# Altium PCB HSBNE-IO.PcbDoc (part 2 of 2)
Units mm, origin at the board's own origin, x right, y up, seen from the top; angles counter-clockwise.
Board outline 100.03 x 80.03 mm, 2 copper layers (Top Layer, Bottom Layer); 109 components, 155 nets, 584 pads, 281 vias.
Unrouted connection lines stored in the file: 2.
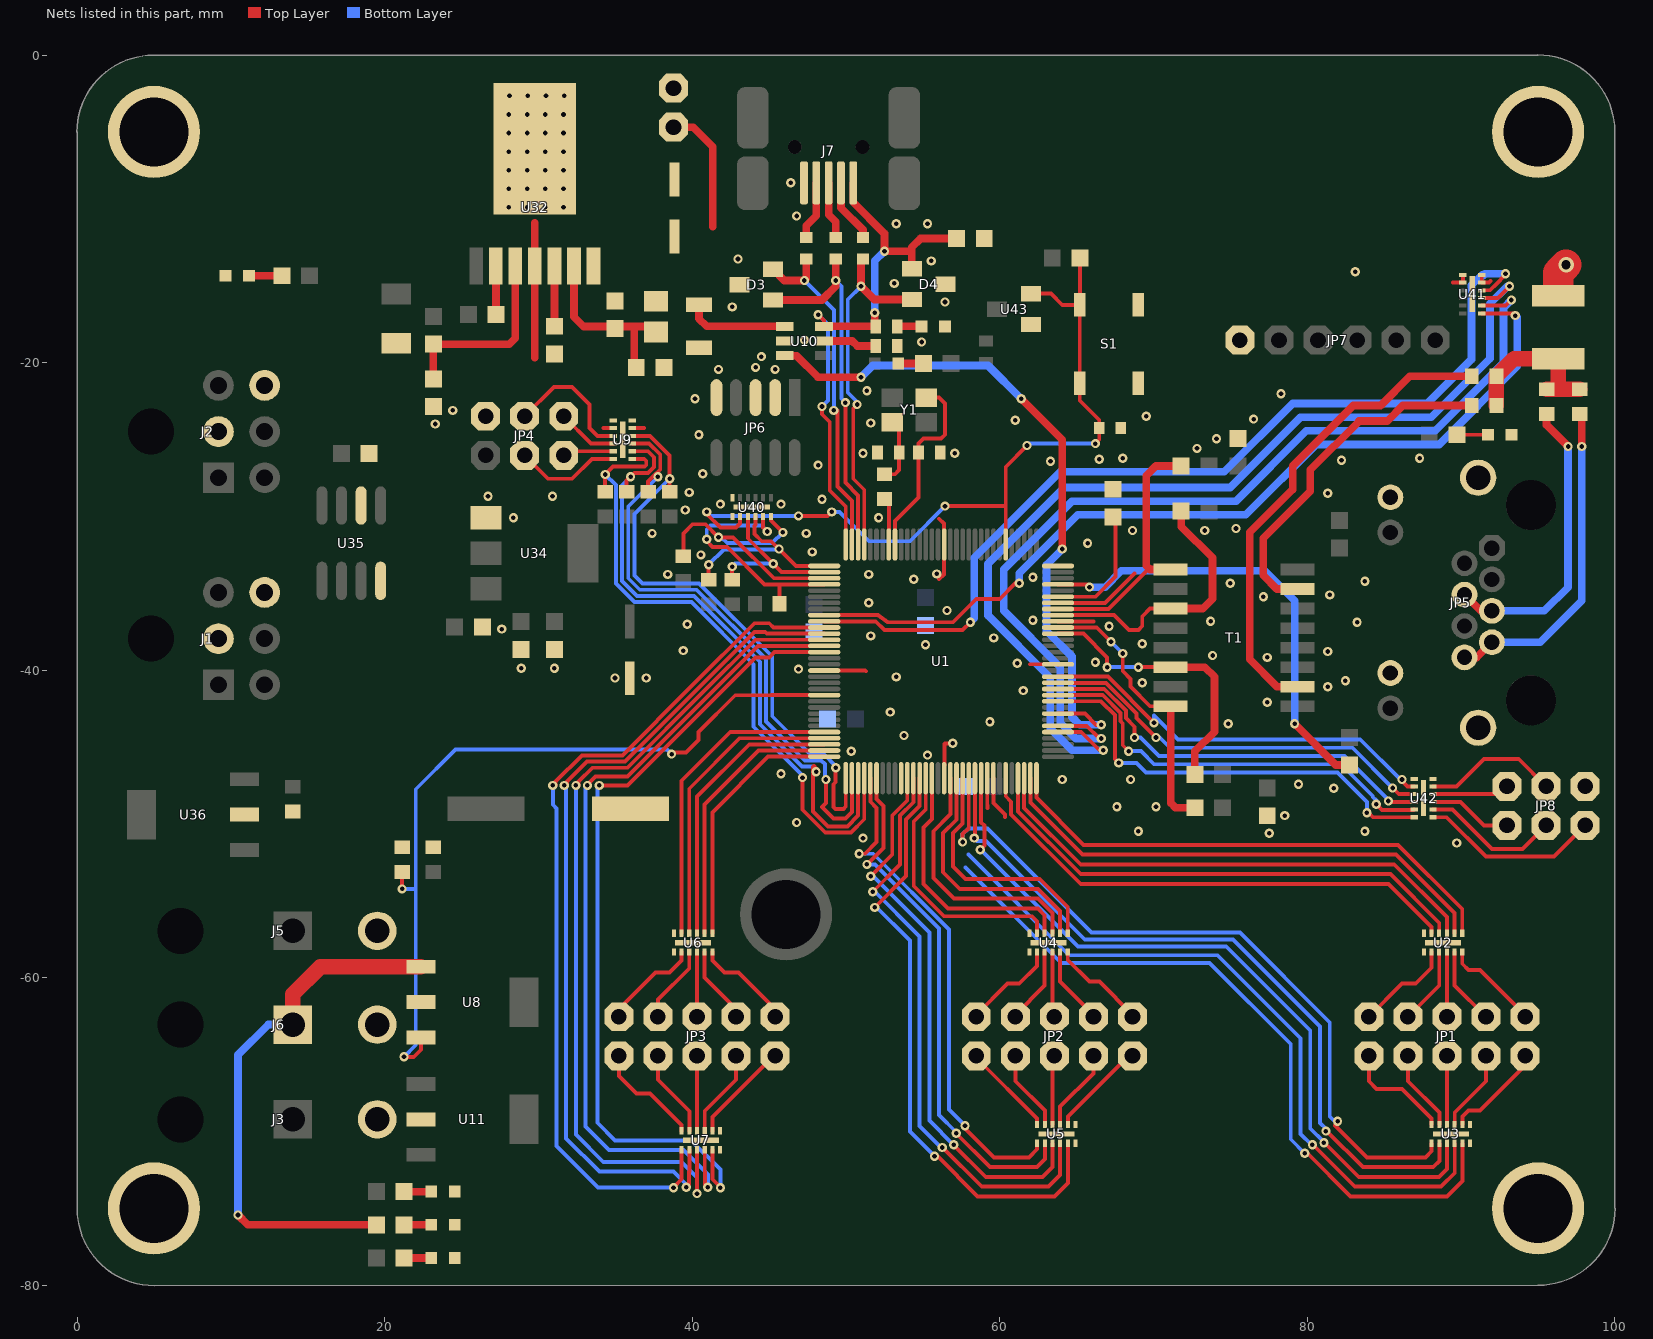
[diagram p2: the nets of this part, all layers, seen from the top]

## Via types
v1: diameter 0.6, hole 0.3, Top Layer to Bottom Layer, tented both sides, 252 vias
v2: diameter 0.6, hole 0.3, Top Layer to Bottom Layer, tented bottom, 28 vias
v3: diameter 1, hole 0.6, Top Layer to Bottom Layer, tented both sides, 1 vias

## Nets (pads, with @x,y where several pads share a name; then routed paths per layer and width w, separated by ;. In a path a pad name is that pad's centre, name@x,y a point inside that pad or via, vN(x,y) a via of type N, cw(c..) or ccw(c..) an arc to the next point about the centre after c; other vN are vias at no path point) (continued)
GND: C3.1 C4.- C5.1 C6.- C7.2 C8.2 C9.1 C10.1 C11.1 C12.1 C13.- C14.1 C15.1 C16.1 C17.1 C20.1 C21.1 C24.1 C25.1 C26.1 C27.2 D1.2 D2.2 D3.3 D4.3 D5.2 D7.2 D8.2 D9.2 J1.2 J1.6 J2.2 J2.6 J3.2 J4.2 J5.2 J6.2 J7.5 JP4.2 JP5.10 JP5.12 JP5.GND1 JP5.GND2 JP6.3 JP6.5 JP6.9 JP7.6 JP8.6 pad.0 pad.1 pad.2 pad.3 R6.1 R7.1 R10.1 R25.1 R26.1 R27.1 R28.1 S1.1 S1.2 U1.10 U1.17 U1.48 U1.55 U1.58 U1.64 U1.80 U1.114 U2.6 U2.7 U2.13 U3.6 U3.7 U3.13 U4.6 U4.7 U4.13 U5.6 U5.7 U5.13 U6.6 U6.7 U6.13 U7.6 U7.7 U7.13 U8.2 U9.5 U9.6 U9.7 U9.8 U9.13 U10.2 U11.2 U32.4 U32.8 U34.1 U35.2 U35.8 U36.2 U40.6 U40.7 U40.13 U41.5 U41.6 U41.7 U41.8 U41.13 U42.6 U42.7 U42.13 U43.1 | length 33.8
  Top Layer w0.254: 34.226,-24.259 U9.8@34.87,-24.259 ; U9.5@36.098,-24.259 36.869,-24.259 ; U1.114@48.585,-40.021 51.247,-40.021 51.293,-40.067 ; 56.058,-34.087 56.374,-33.771 56.374,-31.832 U1.80@56.385,-31.821 56.374,-31.81 56.374,-30.466 56.058,-30.15 ; U1.17@56.385,-47.021 56.385,-46.188 56.396,-46.177 56.396,-44.798 ; 56.439,-44.755 v1(56.947,-44.755) ; 61.962,-39.61 63.785,-39.61 U1.48@63.785,-39.621 ; U1.55@63.785,-36.821 66.091,-36.821 ; U1.58@63.785,-35.621 66.843,-35.621 68.758,-33.706 ; 89.471,-14.795 U41.8@90.115,-14.795 U41.7@90.115,-14.295 ; U41.6@91.343,-14.295 U41.5@91.343,-14.795 91.802,-14.795 91.916,-14.681
  Top Layer w0.5: 29.769,-19.675 U32.4@29.769,-13.722 29.769,-10.912
  Top Layer w2: C27.2@96.317,-15.164 96.317,-14.148 v3(96.825,-13.64)
  other v1: 89.713,-51.232 51.105,-50.917 77.521,-50.597 69.012,-50.47 83.744,-50.47 46.787,-49.901 78.537,-49.454 67.615,-48.885 70.155,-48.885 81.712,-47.676 79.426,-47.422 64.059,-47.107 68.504,-47.107 45.771,-46.726 55.296,-45.517 50.343,-45.263 53.772,-44.247 74.854,-43.485 59.36,-43.358 52.883,-42.723 77.394,-42.088 61.519,-41.326 81.331,-41.072 69.266,-40.818 82.474,-40.691 34.976,-40.503 37.008,-40.503 53.264,-40.437 46.914,-39.929 28.88,-39.868 31.039,-39.868 61.138,-39.548 66.218,-39.487 77.394,-39.167 73.838,-39.04 81.331,-38.786 39.421,-38.725 55.169,-38.344 69.266,-38.278 59.614,-37.897 51.613,-37.77 27.61,-37.328 67.107,-37.135 39.675,-37.008 83.236,-36.881 73.711,-36.82 62.154,-36.754 56.566,-36.119 51.486,-35.611 77.14,-35.23 81.458,-35.103 74.981,-34.341 83.744,-34.214 54.407,-34.087 62.154,-33.96 38.405,-33.772 51.486,-33.772 55.9,-33.737 40.564,-32.502 47.803,-32.309 65.71,-31.74 37.389,-31.105 47.422,-31.105 68.631,-30.912 73.33,-30.912 75.362,-30.785 28.372,-30.089 52.121,-30.089 39.548,-29.581 41.834,-29.2 45.771,-29.2 48.438,-28.88 26.721,-28.692 30.912,-28.692 81.331,-28.499 39.802,-28.438 40.691,-27.229 48.184,-26.66 63.297,-26.406 82.22,-26.34 66.472,-26.279 67.996,-26.213 87.3,-26.213 51.105,-25.898 57.074,-25.898 72.822,-25.578 74.092,-24.943 40.437,-24.689 23.292,-23.993 51.613,-23.927 61.011,-23.739 76.505,-23.673 69.52,-23.485 24.435,-23.104 40.183,-22.342 78.283,-22.022 51.359,-21.834 41.707,-20.437 45.39,-20.437 44.12,-20.31 44.501,-19.609 54.915,-18.659 47.295,-18.532 42.596,-16.373 56.439,-16.053 53.137,-14.849 83.109,-14.087 55.55,-13.386 42.977,-13.259 53.264,-10.973 55.296,-10.973 46.787,-10.465 46.406,-8.306
  other v2: 28.076,-9.896 29.261,-9.896 30.446,-9.896 31.632,-9.896 28.076,-8.69 29.261,-8.69 30.446,-8.69 31.632,-8.69 28.076,-7.483 29.261,-7.483 30.446,-7.483 31.632,-7.483 28.076,-6.277 29.261,-6.277 30.446,-6.277 31.632,-6.277 28.076,-5.07 29.261,-5.07 30.446,-5.07 31.632,-5.07 28.076,-3.864 29.261,-3.864 30.446,-3.864 31.632,-3.864 28.118,-2.657 29.303,-2.657 30.489,-2.657 31.674,-2.657
I2C5CLK: R32.1 U1.1 U9.4 | length 38.5
  Top Layer w0.254: U9.4@36.098,-24.759 37.266,-24.759 38.532,-26.025 v1(38.532,-27.549) R32.1@38.532,-28.4 ; v1(49.327,-46.345) 49.327,-47.288 49.2,-47.415 49.2,-48.885 49.327,-49.012 49.835,-49.012 49.985,-48.862 U1.1@49.985,-47.021
  Bottom Layer w0.254: v1(38.532,-27.549) 36.246,-29.835 36.246,-33.853 36.754,-34.361 40.454,-34.361 45.205,-39.112 45.205,-42.994 47.667,-45.456 48.552,-45.456 49.327,-46.231 v1(49.327,-46.345)
I2C5CLK_FIL: JP4.4 U9.9 | length 8.8
  Top Layer w0.254: JP4.4@29.104,-23.485 31.009,-21.58 32.182,-21.58 33.325,-22.723 33.325,-24.247 33.837,-24.759 U9.9@34.87,-24.759
I2C5SDA: R33.1 U1.2 U9.3 | length 40.3
  Top Layer w0.254: U9.3@36.098,-25.259 37.194,-25.259 37.92,-25.985 37.92,-26.954 v1@37.527,-27.347 ; R33.1@37.135,-28.4 37.135,-27.739 v1@37.527,-27.347 ; v1(37.77,-27.422) 37.695,-27.347 v1@37.527,-27.347 ; v1(48.692,-47.107) 48.692,-48.631 48.438,-48.885 49.2,-49.647 49.962,-49.647 50.385,-49.224 U1.2@50.385,-47.021
  Bottom Layer w0.254: v1(37.77,-27.422) 35.842,-29.35 35.842,-34.02 36.587,-34.765 40.287,-34.765 44.801,-39.279 44.801,-43.343 47.318,-45.86 48.385,-45.86 48.634,-46.109 48.634,-47.049 v1(48.692,-47.107)
I2C5SDA_FIL: JP4.6 U9.10 | length 4
  Top Layer w0.254: JP4.6@31.644,-23.485 33.418,-25.259 U9.10@34.87,-25.259
I2C8CLK: R37.1 U1.3 U9.2 | length 42
  Top Layer w0.254: R37.1@35.738,-28.4 35.738,-27.676 v1(35.992,-27.422) 36.246,-27.168 37.135,-27.168 37.516,-26.787 37.516,-26.152 37.123,-25.759 U9.2@36.098,-25.759 ; 47.93,-46.218 47.908,-46.24 48.057,-46.39 v1@48.057,-46.486 ; v1(48.057,-46.599) v1@48.057,-46.486 ; U1.3@50.785,-47.021 50.785,-49.459 50.089,-50.155 48.819,-50.155 47.861,-49.197 47.861,-46.29 v1@48.057,-46.486
  Bottom Layer w0.254: v1(35.992,-27.422) 35.438,-27.976 35.438,-34.188 36.419,-35.169 40.119,-35.169 44.397,-39.447 44.397,-43.511 47.15,-46.264 47.849,-46.264 48.057,-46.472 v1(48.057,-46.599)
I2C8CLK_FIL: JP4.5 U9.11 | length 3.3
  Top Layer w0.254: JP4.5@31.644,-26.025 31.91,-25.759 U9.11@34.87,-25.759
I2C8SDA: R38.1 U1.4 U9.1 | length 42.2
  Top Layer w0.254: R38.1@34.341,-28.4 v1(34.341,-27.272) 34.849,-26.764 36.904,-26.764 37.008,-26.66 37.008,-26.406 36.861,-26.259 U9.1@36.098,-26.259 ; v1(47.168,-46.98) 47.168,-49.075 48.652,-50.559 50.32,-50.559 51.185,-49.694 U1.4@51.185,-47.021
  Bottom Layer w0.254: v1(34.341,-27.272) 35.034,-27.965 35.034,-34.355 36.252,-35.573 39.952,-35.573 43.993,-39.614 43.993,-43.678 47.168,-46.853 v1(47.168,-46.98)
I2C8SDA_FIL: JP4.3 U9.12 | length 6.9
  Top Layer w0.254: JP4.3@29.104,-26.025 30.628,-27.549 32.182,-27.549 33.472,-26.259 U9.12@34.87,-26.259
LINK-LED: R17.2 U1.61 | length 29.4
  Top Layer w0.254: U1.61@63.785,-34.421 63.808,-34.444 63.831,-34.421 65.663,-34.421 v1(65.837,-34.595)
  Top Layer w0.5: v1(79.172,-43.485) 81.85,-46.163 R17.2@82.728,-46.163
  Bottom Layer w0.5: v1(65.837,-34.595) 66.853,-34.595 67.911,-33.537 77.225,-33.537 79.172,-35.484 v1(79.172,-43.485)
MC1: U1.32 U2.1 | length 33.5
  Top Layer w0.254: U1.32@62.385,-47.021 62.385,-48.288 65.456,-51.359 85.903,-51.359 90.074,-55.53 U2.1@90.074,-57.095
MC2: U1.25 U3.5 | length 50.5
  Top Layer w0.254: U1.25@59.585,-47.021 59.585,-48.631 60.335,-49.381 60.335,-49.542 ; v1(79.824,-71.408) 80.008,-71.408 82.819,-74.219 89.078,-74.219 90.082,-73.215 U3.5@90.082,-70.769
  Bottom Layer w0.254: 57.754,-52.822 57.775,-52.822 63.996,-59.043 73.648,-59.043 78.918,-64.313 78.918,-70.502 v1(79.824,-71.408)
MC3: U1.31 U2.2 | length 33.4
  Top Layer w0.254: U1.31@61.985,-47.021 61.985,-48.589 65.39,-51.994 85.776,-51.994 89.574,-55.792 U2.2@89.574,-57.095
MC4: U1.24 U3.4 | length 48.4
  Top Layer w0.254: 59.185,-48.806 U1.24@59.185,-47.021 ; 59.189,-48.968 59.189,-48.806 ; v1(80.327,-70.85) 80.348,-70.85 83.082,-73.584 88.697,-73.584 89.582,-72.699 U3.4@89.582,-70.769
  Bottom Layer w0.254: 57.963,-51.994 64.504,-58.535 74.156,-58.535 79.553,-63.932 79.553,-70.147 80.256,-70.85 v1(80.327,-70.85)
MC5: U1.30 U2.3 | length 33.4
  Top Layer w0.254: U1.30@61.585,-47.021 61.585,-48.951 65.263,-52.629 85.649,-52.629 89.074,-56.054 U2.3@89.074,-57.095
MC6: U1.23 U3.3 | length 49.8
  Top Layer w0.254: v1(58.725,-51.679) 58.998,-51.406 58.998,-50.108 58.785,-49.895 U1.23@58.785,-47.021 ; v1(81.077,-70.729) 81.125,-70.729 83.345,-72.949 88.57,-72.949 89.082,-72.437 U3.3@89.082,-70.769
  Bottom Layer w0.254: v1(58.725,-51.679) 58.725,-51.613 65.075,-57.963 74.727,-57.963 80.188,-63.424 80.188,-69.792 81.077,-70.681 v1(81.077,-70.729)
MC7: U1.29 U2.4 | length 33.2
  Top Layer w0.254: U1.29@61.185,-47.021 61.185,-49.186 65.263,-53.264 85.395,-53.264 88.574,-56.443 U2.4@88.574,-57.095
MC8: U1.22 U3.2 | length 47.9
  Top Layer w0.254: v1@58.385,-50.876 U1.22@58.385,-47.021 ; v1@81.309,-70.015 83.608,-72.314 88.189,-72.314 88.582,-71.921 U3.2@88.582,-70.769
  Bottom Layer w0.254: v1(58.344,-50.917) 58.529,-51.102 59.112,-51.102 65.524,-57.514 75.176,-57.514 80.823,-63.161 80.823,-69.437 81.204,-69.818 v1(81.204,-69.967)
MC9: U1.27 U2.5 | length 33.3
  Top Layer w0.254: U1.27@60.385,-47.021 60.385,-48.198 60.739,-48.552 60.739,-49.375 65.263,-53.899 85.268,-53.899 88.074,-56.705 U2.5@88.074,-57.095
MC10: U1.21 U3.1 | length 48.7
  Top Layer w0.254: v1(57.582,-51.171) 57.582,-50.663 57.985,-50.26 U1.21@57.985,-47.021 ; 81.804,-69.612 83.871,-71.679 87.681,-71.679 88.082,-71.278 U3.1@88.082,-70.769
  Bottom Layer w0.254: v1(57.582,-51.171) 57.582,-50.663 57.963,-50.282 59.19,-50.282 65.973,-57.065 75.625,-57.065 81.458,-62.898 81.458,-69.012 81.804,-69.358 81.83,-69.332 v1(81.966,-69.332)
MC11: U1.20 U4.1 | length 16.3
  Top Layer w0.254: U1.20@57.585,-47.021 57.585,-49.959 56.947,-50.597 56.947,-52.756 57.775,-53.584 62.601,-53.584 64.42,-55.403 U4.1@64.42,-57.095
MC12: U1.13 U5.5 | length 40.3
  Top Layer w0.254: v1(51.867,-55.423) 53.899,-53.391 53.899,-49.708 54.785,-48.822 U1.13@54.785,-47.021 ; v1(55.758,-71.598) 55.941,-71.598 58.562,-74.219 63.551,-74.219 64.428,-73.342 U5.5@64.428,-70.769
  Bottom Layer w0.254: v1(51.867,-55.423) 51.867,-55.296 54.153,-57.582 54.153,-69.994 v1(55.758,-71.598)
MC13: U1.19 U4.2 | length 16.6
  Top Layer w0.254: U1.19@57.185,-47.021 57.185,-49.724 56.312,-50.597 56.312,-53.137 57.394,-54.219 62.474,-54.219 63.92,-55.665 U4.2@63.92,-57.095
MC14: U1.12 U5.4 | length 38.4
  Top Layer w0.254: v1(51.74,-54.407) 53.518,-52.629 53.518,-49.454 54.385,-48.587 U1.12@54.385,-47.021 ; v1(56.252,-71.033) 56.274,-71.033 58.825,-73.584 63.17,-73.584 63.928,-72.826 U5.4@63.928,-70.769
  Bottom Layer w0.254: v1(51.74,-54.407) 51.74,-54.271 54.788,-57.319 54.788,-69.639 56.182,-71.033 v1(56.252,-71.033)
MC15: U1.18 U4.3 | length 16.9
  Top Layer w0.254: U1.18@56.785,-47.021 56.785,-49.362 55.677,-50.47 55.677,-53.518 57.013,-54.854 62.474,-54.854 63.42,-55.8 U4.3@63.42,-57.095
MC16: U1.11 U5.3 | length 36.2
  Top Layer w0.254: v1(51.613,-53.391) 53.01,-51.994 53.01,-49.456 53.985,-48.481 U1.11@53.985,-47.021 ; v1(57.002,-70.864) 59.088,-72.949 62.789,-72.949 63.428,-72.31 U5.3@63.428,-70.769
  Bottom Layer w0.254: v1(51.613,-53.391) 51.758,-53.391 55.423,-57.056 55.423,-69.284 v1(57.002,-70.864)
MC17: U1.15 U4.4 | length 17
  Top Layer w0.254: U1.15@55.585,-47.021 55.585,-49.673 55.042,-50.216 55.042,-53.899 56.632,-55.489 62.474,-55.489 62.92,-55.935 U4.4@62.92,-57.095
MC18: U1.6 U5.2 | length 34.4
  Top Layer w0.254: v1(51.359,-52.629) 52.436,-51.552 52.436,-48.824 51.989,-48.377 ; 51.985,-48.377 U1.6@51.985,-47.021 ; v1(57.172,-70.114) 57.172,-70.135 59.351,-72.314 62.408,-72.314 62.928,-71.794 U5.2@62.928,-70.769
  Bottom Layer w0.254: v1(51.359,-52.629) 51.894,-52.629 56.058,-56.793 56.058,-68.929 57.172,-70.043 v1(57.172,-70.114)
MC19: U1.14 U4.5 | length 17.1
  Top Layer w0.254: U1.14@55.185,-47.021 55.185,-49.057 54.407,-49.835 54.407,-54.026 56.378,-55.997 62.093,-55.997 62.42,-56.324 U4.5@62.42,-57.095
MC20: U1.5 U5.1 | length 33.1
  Top Layer w0.254: v1(50.851,-51.933) 51.232,-51.933 51.994,-51.171 51.994,-48.957 51.589,-48.552 ; 51.585,-48.552 U1.5@51.585,-47.021 ; v1(57.737,-69.619) 57.737,-69.802 59.614,-71.679 61.9,-71.679 62.428,-71.151 U5.1@62.428,-70.769
  Bottom Layer w0.254: v1(50.851,-51.933) 51.769,-51.933 56.693,-56.857 56.693,-68.574 v1(57.737,-69.619)
MC21: U1.128 U6.1 | length 16.6
  Top Layer w0.254: U6.1@41.306,-57.095 41.306,-49.253 44.938,-45.621 U1.128@48.585,-45.621
MC22: U1.111 U7.5 | length 53.3
  Top Layer w0.254: v1(33.948,-47.488) 35.791,-47.488 44.112,-39.167 45.009,-39.167 45.355,-38.821 U1.111@48.585,-38.821 ; U7.5@41.314,-71.183 41.314,-73.101 41.834,-73.621 v1(41.834,-73.65)
  Bottom Layer w0.254: v1(33.948,-47.488) 33.833,-47.603 33.833,-69.426 34.976,-70.569 39.929,-70.569 41.834,-72.474 v1(41.834,-73.65)
MC23: U1.127 U6.2 | length 17.6
  Top Layer w0.254: U6.2@40.806,-57.095 40.806,-48.737 44.322,-45.221 U1.127@48.585,-45.221
MC24: U1.110 U7.4 | length 54
  Top Layer w0.254: v1(33.186,-47.488) 33.186,-47.434 33.709,-46.911 35.797,-46.911 44.283,-38.425 ; U7.4@40.814,-71.183 40.814,-72.597 40.841,-72.624 40.841,-73.444 v1(41.014,-73.617) ; 44.283,-38.421 U1.110@48.585,-38.421
  Bottom Layer w0.254: v1(33.186,-47.488) 33.071,-47.603 33.071,-69.68 34.595,-71.204 39.421,-71.204 41.014,-72.797 v1(41.014,-73.617)
MC25: U1.126 U6.3 | length 18.6
  Top Layer w0.254: U6.3@40.306,-57.095 40.306,-48.221 43.706,-44.821 U1.126@48.585,-44.821
MC26: U1.109 U7.3 | length 56.4
  Top Layer w0.254: v1(32.436,-47.488) 32.609,-47.488 32.609,-47.249 33.513,-46.345 35.792,-46.345 40.806,-41.331 40.806,-41.327 44.112,-38.021 ; v1(40.31,-74.031) 40.31,-71.187 U7.3@40.314,-71.183 ; 44.674,-38.017 44.116,-38.017 44.112,-38.021 ; U1.109@48.585,-38.021 44.112,-38.021
  Bottom Layer w0.254: v1(32.436,-47.488) 32.436,-70.188 34.214,-71.966 39.294,-71.966 40.314,-72.986 40.31,-72.99 v1(40.31,-74.031)
MC27: U1.125 U6.4 | length 19.5
  Top Layer w0.254: U6.4@39.806,-57.095 39.806,-47.705 43.09,-44.421 U1.125@48.585,-44.421
MC28: U1.108 U7.2 | length 56
  Top Layer w0.254: v1(31.686,-47.488) 31.859,-47.488 31.859,-47.249 33.167,-45.941 35.624,-45.941 40.402,-41.163 40.402,-41.159 44.059,-37.503 44.742,-37.503 44.86,-37.621 U1.108@48.585,-37.621 ; v1(39.614,-73.617) 39.787,-73.444 39.787,-72.616 39.814,-72.589 U7.2@39.814,-71.183
  Bottom Layer w0.254: v1(31.686,-47.488) 31.801,-47.603 31.801,-70.442 33.96,-72.601 38.786,-72.601 39.614,-73.429 v1(39.614,-73.617)
MC29: U1.124 U6.5 | length 20.5
  Top Layer w0.254: U6.5@39.306,-57.095 39.306,-47.189 42.474,-44.021 U1.124@48.585,-44.021
MC30: U1.107 U7.1 | length 57.3
  Top Layer w0.254: v1(30.936,-47.488) 31.109,-47.488 31.109,-47.249 32.821,-45.537 35.457,-45.537 39.998,-40.996 39.998,-40.992 44.043,-36.947 45.009,-36.947 45.283,-37.221 U1.107@48.585,-37.221 ; v1(38.786,-73.65) 38.786,-73.629 39.314,-73.101 U7.1@39.314,-71.183
  Bottom Layer w0.254: v1(30.936,-47.488) 30.936,-48.749 31.166,-48.979 31.166,-70.95 33.866,-73.65 v1(38.786,-73.65)
MO1: JP1.1 U2.12 | length 6.4
  Top Layer w0.254: U2.12@90.074,-58.323 90.074,-59.086 90.475,-59.487 91.237,-59.487 94.158,-62.408 JP1.1@94.158,-62.535
MO2: JP1.2 U3.8 | length 6.6
  Top Layer w0.254: U3.8@90.082,-69.541 90.082,-69.024 90.475,-68.631 91.237,-68.631 94.158,-65.71 JP1.2@94.158,-65.075
MO3: JP1.3 U2.11 | length 5.1
  Top Layer w0.254: U2.11@89.574,-58.323 89.574,-60.491 JP1.3@91.618,-62.535
MO4: JP1.4 U3.9 | length 5.3
  Top Layer w0.254: U3.9@89.582,-69.541 89.582,-68.762 91.618,-66.726 JP1.4@91.618,-65.075
MO5: JP1.5 U2.10 | length 4.2
  Top Layer w0.254: JP1.5@89.078,-62.535 U2.10@89.078,-58.327
MO6: JP1.6 U3.10 | length 4.5
  Top Layer w0.254: JP1.6@89.078,-65.075 89.078,-69.537 U3.10@89.082,-69.541
MO7: JP1.7 U2.9 | length 5.1
  Top Layer w0.254: JP1.7@86.538,-62.535 88.574,-60.499 U2.9@88.574,-58.323
MO8: JP1.8 U3.11 | length 5.3
  Top Layer w0.254: JP1.8@86.538,-65.075 86.538,-66.726 88.582,-68.77 U3.11@88.582,-69.541
MO9: JP1.9 U2.8 | length 6.4
  Top Layer w0.254: JP1.9@83.998,-62.535 86.157,-60.376 87.046,-60.376 88.074,-59.348 U2.8@88.074,-58.323
MO10: JP1.10 U3.12 | length 7.1
  Top Layer w0.254: JP1.10@83.998,-65.075 83.998,-66.726 84.506,-67.234 86.157,-67.234 88.082,-69.159 U3.12@88.082,-69.541
MO11: JP2.1 U4.12 | length 6.2
  Top Layer w0.254: U4.12@64.42,-58.323 64.42,-58.832 65.837,-60.249 66.472,-60.249 JP2.1@68.631,-62.408
MO12: JP2.2 U5.8 | length 6.4
  Top Layer w0.254: U5.8@64.428,-69.541 64.428,-69.024 68.504,-64.948 JP2.2@68.631,-64.948
MO13: JP2.3 U4.11 | length 5
  Top Layer w0.254: U4.11@63.92,-58.323 63.92,-60.237 JP2.3@66.091,-62.408
MO14: JP2.4 U5.9 | length 5.5
  Top Layer w0.254: U5.9@63.928,-69.541 63.928,-68.381 66.091,-66.218 JP2.4@66.091,-64.948
MO15: JP2.5 U4.10 | length 4.1
  Top Layer w0.254: U4.10@63.42,-58.323 63.42,-62.277 JP2.5@63.551,-62.408
MO16: JP2.6 U5.10 | length 4.6
  Top Layer w0.254: U5.10@63.428,-69.541 63.428,-65.071 JP2.6@63.551,-64.948
MO17: JP2.7 U4.9 | length 4.9
  Top Layer w0.254: JP2.7@61.011,-62.408 62.92,-60.499 U4.9@62.92,-58.323
MO18: JP2.8 U5.11 | length 5.4
  Top Layer w0.254: JP2.8@61.011,-64.948 61.011,-66.726 62.928,-68.643 U5.11@62.928,-69.541
MO19: JP2.9 U4.8 | length 6.2
  Top Layer w0.254: JP2.9@58.471,-62.408 60.503,-60.376 61.265,-60.376 62.42,-59.221 U4.8@62.42,-58.323
MO20: JP2.10 U5.12 | length 6.2
  Top Layer w0.254: JP2.10@58.471,-64.948 58.471,-65.202 62.428,-69.159 U5.12@62.428,-69.541
MO21: JP3.1 U6.12 | length 5.9
  Top Layer w0.254: U6.12@41.306,-58.323 41.306,-58.865 42.088,-59.647 43.01,-59.647 JP3.1@45.39,-62.027
MO22: JP3.2 U7.8 | length 7.1
  Top Layer w0.254: U7.8@41.314,-69.955 41.314,-69.057 45.39,-64.981 JP3.2@45.39,-64.567
MO23: JP3.3 U6.11 | length 4.6
  Top Layer w0.254: U6.11@40.806,-58.323 40.806,-59.983 JP3.3@42.85,-62.027
MO24: JP3.4 U7.9 | length 6.2
  Top Layer w0.254: U7.9@40.814,-69.955 40.814,-68.668 42.85,-66.632 JP3.4@42.85,-64.567
MO25: JP3.5 U6.10 | length 3.7
  Top Layer w0.254: U6.10@40.306,-58.323 40.306,-62.023 JP3.5@40.31,-62.027
MO26: JP3.6 U7.10 | length 5.4
  Top Layer w0.254: U7.10@40.314,-69.955 JP3.6@40.314,-64.571
MO27: JP3.7 U6.9 | length 4.5
  Top Layer w0.254: JP3.7@37.77,-62.027 37.77,-61.425 39.806,-59.389 U6.9@39.806,-58.323
MO28: JP3.8 U7.11 | length 6.2
  Top Layer w0.254: JP3.8@37.77,-64.567 37.77,-66.632 39.814,-68.676 U7.11@39.814,-69.955
MO29: JP3.9 U6.8 | length 5.9
  Top Layer w0.254: JP3.9@35.23,-62.027 37.61,-59.647 38.532,-59.647 39.306,-58.873 U6.8@39.306,-58.323
MO30: JP3.10 U7.12 | length 7.6
  Top Layer w0.254: JP3.10@35.23,-64.567 35.23,-66.378 36.373,-67.521 37.262,-67.521 39.314,-69.573 U7.12@39.314,-69.955
NetC1_1: C1.1 R8.1 R10.2 U32.6 | length 11.4
  Top Layer w0.5: U32.6@32.309,-13.722 32.309,-17.008 32.955,-17.654 34.976,-17.654 C1.1@37.616,-17.654 ; R10.2@36.235,-20.183 36.235,-17.665
NetC3_2: C3.2 U32.5 | length 3.9
  Top Layer w0.5: C3.2@31.039,-17.632 U32.5@31.039,-13.722
NetC25_2: C25.2 R20.2 Y1.1 | length 4.4
  Top Layer w0.254: R20.2@52.502,-27.257 53.175,-27.257 53.456,-26.976 C25.2@53.456,-25.832 53.456,-24.322 Y1.1@53.01,-23.876
NetC26_2: C26.2 U1.88 Y1.3 | length 12.6
  Top Layer w0.254: U1.88@53.185,-31.821 53.185,-30.295 54.723,-28.757 C26.2@54.723,-25.832 54.723,-25.262 55.042,-24.943 56.185,-24.943 56.439,-24.689 56.439,-22.657 56.058,-22.276 Y1.3@55.21,-22.276
NetC27_1: C27.1 R21.2 R22.2 R23.2 R24.2 | length 10.4
  Top Layer w1: R23.2@92.291,-22.784 R24.2@92.291,-20.879 93.434,-19.736 96.299,-19.736 C27.1@96.317,-19.754 96.317,-21.603 ; R21.2@95.555,-21.73 R22.2@97.714,-21.73
NetD1_1: D1.1 R34.1 | length 2
  Top Layer w0.254: R34.1@89.724,-24.689 D1.1@91.745,-24.689
NetD2_1: D2.1 R2.1 | length 1.6
  Top Layer w0.5: R2.1@53.329,-17.643 D2.1@54.915,-17.643
NetD5_1: D5.1 R3.1 | length 2.1
  Top Layer w0.5: D5.1@11.176,-14.351 R3.1@13.324,-14.351
NetD6_1: D6.1 R5.1 | length 1.6
  Top Layer w0.5: D6.1@53.391,-20.056 R5.1@55.031,-20.056
NetD7_1: D7.1 R11.1 | length 1.8
  Top Layer w0.5: R11.1@21.271,-76.063 D7.1@23.038,-76.063
NetD8_1: D8.1 R12.1 | length 1.8
  Top Layer w0.5: R12.1@21.271,-78.222 D8.1@23.038,-78.222
NetD9_1: D9.1 R30.1 | length 1.8
  Top Layer w0.5: R30.1@21.271,-73.904 D9.1@23.038,-73.904
NetJ7_2: J7.2 L1.2 | length 4.1
  Top Layer w0.5: J7.2@49.67,-8.306 49.67,-9.919 51.105,-11.354 L1.2@51.105,-11.859
NetJ7_3: J7.3 L2.2 | length 3.7
  Top Layer w0.5: J7.3@48.87,-8.306 48.87,-10.389 49.327,-10.846 L2.2@49.327,-11.859
NetJ7_4: J7.4 L3.2 | length 3.8
  Top Layer w0.5: L3.2@47.422,-11.859 47.422,-11.1 48.07,-10.452 J7.4@48.07,-8.306
NetJP5_4: JP5.4 JP5.5 R21.1 | length 19.7
  Top Layer w0.5: JP5.4@90.22,-35.088 91.27,-36.138 JP5.5@92,-36.138 ; R21.1@95.555,-23.33 95.555,-24.053 v1(96.953,-25.451)
  Bottom Layer w0.5: JP5.5@92,-36.138 95.412,-36.138 96.953,-34.597 v1(96.953,-25.451)
NetJP5_7: JP5.7 JP5.8 R22.1 | length 21.4
  Top Layer w0.5: JP5.8@90.22,-39.168 91.01,-39.168 JP5.7@92,-38.178 ; R22.1@97.714,-23.33 97.842,-23.458 v1(97.842,-25.451)
  Bottom Layer w0.5: JP5.7@92,-38.178 95.15,-38.178 97.842,-35.486 v1(97.842,-25.451)
NetR1_1: R1.1 R7.2 U32.3 | length 12.4
  Top Layer w0.5: R7.2@23.165,-21.061 R1.1@23.165,-18.797 28.107,-18.797 28.499,-18.405 U32.3@28.499,-13.722
NetR6_2: R6.2 U10.5 | length 3.5
  Top Layer w0.5: U10.5@48.565,-18.593 50.404,-18.593 50.724,-18.913 R6.2@51.929,-18.913
NetR9_2: R9.2 U32.2 | length 3.1
  Top Layer w0.5: R9.2@27.24,-16.881 U32.2@27.24,-13.733
NetR20_1: R20.1 U1.89 | length 3.1
  Top Layer w0.254: R20.1@52.502,-28.857 52.785,-29.14 U1.89@52.785,-31.821
NetR23_1: R23.1 T1.15 | length 23
  Top Layer w0.5: T1.15@79.363,-34.722 78.029,-34.722 77.14,-33.833 77.14,-31.42 80.188,-28.372 80.188,-26.975 83.363,-23.8 85.186,-23.8 86.202,-22.784 R23.1@90.691,-22.784
NetR24_1: R24.1 T1.10 | length 31.6
  Top Layer w0.5: T1.10@79.363,-41.072 78.029,-41.072 76.251,-39.294 76.251,-31.039 79.045,-28.245 79.045,-26.721 82.982,-22.784 84.76,-22.784 86.665,-20.879 R24.1@90.691,-20.879
NetR25_2: R25.2 U1.59 | length 8.2
  Top Layer w0.254: U1.59@63.785,-35.221 66.227,-35.221 67.534,-33.914 67.534,-30.207 R25.2@67.361,-30.034
R\S\T\: C24.2 R19.1 S1.3 S1.4 U1.70 U40.8 U43.2 | length 52.3
  Top Layer w0.254: v1(40.945,-29.708) 40.945,-29.835 41.834,-30.724 42.85,-30.724 43.116,-30.458 U40.8@43.116,-30.002 ; v1(46.911,-29.965) 48.816,-29.965 v1(49.073,-29.708) ; v1(56.439,-29.327) 60.385,-29.327 ; U1.70@60.385,-31.821 60.385,-29.327 ; v1(61.773,-25.39) 60.385,-26.778 60.385,-29.327 ; U43.2@62.027,-15.516 63.329,-15.516 64.059,-16.246 S1.3@65.202,-16.246 S1.4@65.202,-21.326 65.202,-22.469 66.469,-23.736 C24.2@66.469,-24.247 66.469,-25.012 v1(66.218,-25.263) ; S1.3@65.213,-16.235 R19.1@65.213,-13.198
  Bottom Layer w0.254: v1(40.945,-29.708) 41.202,-29.965 v1(46.911,-29.965) ; v1(49.073,-29.708) 49.581,-29.708 51.486,-31.613 54.153,-31.613 v1(56.439,-29.327) ; v1(61.773,-25.39) 61.9,-25.263 v1(66.218,-25.263)
RX_N: R14.1 T1.8 U1.54 | length 18.4
  Top Layer w0.254: U1.54@63.785,-37.221 66.304,-37.221 v1(67.234,-38.151) ; v1(67.996,-38.913) 67.996,-40.056 68.504,-40.564 68.504,-41.072 69.774,-42.342 T1.8@71.107,-42.342
  Top Layer w0.5: T1.8@71.107,-42.342 71.107,-48.628 71.425,-48.946 R14.1@72.684,-48.946
  Bottom Layer w0.254: v1(67.234,-38.151) v1(67.996,-38.913)
RX_P: R15.1 T1.6 U1.53 | length 18.6
  Top Layer w0.254: U1.53@63.785,-37.621 65.434,-37.621 66.98,-39.167 v1(66.98,-39.802) ; v1(69.012,-39.802) T1.6@71.107,-39.802
  Top Layer w0.5: T1.6@71.107,-39.802 73.33,-39.802 73.965,-40.437 73.965,-43.993 72.684,-45.274 R15.1@72.684,-46.787
  Bottom Layer w0.254: v1(66.98,-39.802) v1(69.012,-39.802)
SOL_12V: J6.1 R11.2 U8.1 | length 35.1
  Top Layer w0.5: v1(10.465,-75.428) 11.1,-76.063 R11.2@19.471,-76.063
  Top Layer w1: J6.1@14.021,-63.043 14.021,-61.077 15.813,-59.285 U8.1@22.355,-59.285
  Bottom Layer w0.5: v1(10.465,-75.428) 10.465,-65.014 12.436,-63.043 J6.1@14.021,-63.043
SOL_EN: R27.2 U1.118 U8.3 | length 51.4
  Top Layer w0.254: v1(21.133,-54.219) R27.2@21.133,-53.114 ; v1(21.26,-65.141) 21.895,-65.141 22.355,-64.681 U8.3@22.355,-63.885 ; v1(38.659,-45.456) 38.775,-45.34 39.591,-45.34 40.4,-44.531 40.4,-44.022 42.797,-41.625 45.157,-41.625 ; 45.161,-41.625 45.157,-41.625 ; U1.118@48.585,-41.621 45.161,-41.621 45.157,-41.625
  Bottom Layer w0.254: v1(21.133,-54.219) 22.022,-54.219 ; v1(21.26,-65.141) 22.022,-64.379 22.022,-47.742 24.597,-45.167 38.37,-45.167 v1(38.659,-45.456)
TCK: R31.1 U1.100 U40.11 | length 16.1
  Top Layer w0.254: v1(40.945,-31.486) 40.945,-31.613 41.326,-31.994 42.281,-31.994 44.708,-34.421 U1.100@48.585,-34.421 ; U40.11@44.616,-30.002 44.616,-30.712 v1(44.882,-30.978) ; R31.1@45.682,-35.677 45.682,-34.463
  Bottom Layer w0.254: v1(40.945,-31.486) 40.945,-30.851 41.199,-30.597 44.501,-30.597 v1(44.882,-30.978)
TDCLK: JP8.2 U42.4 | length 5
  Top Layer w0.254: U42.4@88.168,-48.061 92.473,-48.061 JP8.2@92.985,-47.549
TDI: R35.2 U1.98 U40.9 | length 10.9
  Top Layer w0.254: R35.2@42.596,-34.115 v1(42.596,-33.264) ; U40.9@43.616,-30.002 43.616,-31.416 43.612,-31.42 v1(45.263,-33.071) 45.813,-33.621 U1.98@48.585,-33.621
  Bottom Layer w0.254: v1(42.596,-33.264) 42.789,-33.071 v1(45.263,-33.071)
TDO: R36.2 U1.97 U40.10 | length 12.5
  Top Layer w0.254: R36.2@41.072,-34.115 v1(41.072,-33.137) ; U40.10@44.116,-30.002 44.116,-30.54 44.046,-30.61 44.046,-31.141 44.519,-31.613 45.136,-31.613 v1(45.644,-32.121) 46.744,-33.221 U1.97@48.585,-33.221
  Bottom Layer w0.254: v1(41.072,-33.137) 42.065,-32.144 45.621,-32.144 v1(45.644,-32.121)
TDR0: JP8.1 U42.3 | length 5.4
  Top Layer w0.254: U42.3@88.168,-48.561 89.967,-48.561 ; 89.967,-48.569 91.487,-50.089 JP8.1@92.985,-50.089
TDR1: JP8.3 U42.2 | length 9
  Top Layer w0.254: U42.2@88.168,-49.061 89.447,-49.061 91.999,-51.613 94.001,-51.613 JP8.3@95.525,-50.089
TDR2: JP8.5 U42.1 | length 11.8
  Top Layer w0.254: U42.1@88.168,-49.561 89.058,-49.561 91.618,-52.121 96.033,-52.121 JP8.5@98.065,-50.089
TDR3: JP8.4 U42.5 | length 8.8
  Top Layer w0.254: U42.5@88.168,-47.561 89.701,-47.561 91.491,-45.771 93.747,-45.771 JP8.4@95.525,-47.549
TMS: R29.1 U1.99 U40.12 | length 18.4
  Top Layer w0.254: R29.1@39.421,-32.591 39.421,-31.105 40.018,-30.508 40.856,-30.508 v1(41.707,-31.359) 42.662,-31.359 45.324,-34.021 U1.99@48.585,-34.021 ; U40.12@45.116,-30.002 45.116,-30.257 v1(45.898,-31.039)
  Bottom Layer w0.254: v1(41.707,-31.359) 41.9,-31.359 42.281,-31.74 45.197,-31.74 v1(45.898,-31.039)
TRCLK: U1.45 U42.9 | length 26.3
  Top Layer w0.254: U1.45@63.785,-40.821 66.895,-40.821 68.885,-42.811 68.885,-43.105 v1(70.155,-44.375) ; v1(85.542,-47.657) 85.946,-48.061 U42.9@86.94,-48.061
  Bottom Layer w0.254: v1(70.155,-44.375) 70.4,-44.375 71.065,-45.04 82.925,-45.04 v1(85.542,-47.657)
TRD0: U1.44 U42.10 | length 26.9
  Top Layer w0.254: U1.44@63.785,-41.221 66.794,-41.221 68.196,-42.623 68.196,-43.116 68.758,-43.678 v1(68.758,-44.374) ; v1(85.268,-48.504) 85.325,-48.561 U42.10@86.94,-48.561
  Bottom Layer w0.254: v1(68.758,-44.374) 69.139,-44.374 70.344,-45.579 82.409,-45.579 85.268,-48.438 v1(85.268,-48.504)
TRD1: U1.43 U42.11 | length 27.6
  Top Layer w0.254: U1.43@63.785,-41.621 66.694,-41.621 67.842,-42.769 67.842,-43.3 67.996,-43.454 67.996,-44.882 v1(68.377,-45.263) ; v1(84.487,-48.712) 84.856,-49.081 86.92,-49.081 U42.11@86.94,-49.061
  Bottom Layer w0.254: v1(68.377,-45.263) 69.178,-45.263 70.032,-46.117 82.185,-46.117 84.252,-48.184 84.252,-48.232 84.487,-48.467 v1(84.487,-48.712)
TRD2: U1.42 U42.12 | length 28.4
  Top Layer w0.254: U1.42@63.785,-42.021 66.593,-42.021 67.488,-42.916 67.488,-45.771 v1(67.742,-46.025) ; v1(83.871,-49.266) 83.986,-49.266 84.281,-49.561 U42.12@86.94,-49.561
  Bottom Layer w0.254: v1(67.742,-46.025) 68.885,-46.025 69.516,-46.656 81.962,-46.656 83.871,-48.565 v1(83.871,-49.266)
TRD3: U1.46 U42.8 | length 26.9
  Top Layer w0.254: U1.46@63.785,-40.421 67.025,-40.421 v1(70.028,-43.424) ; v1(86.157,-47.107) 86.157,-47.217 86.501,-47.561 U42.8@86.94,-47.561
  Bottom Layer w0.254: v1(70.028,-43.424) 70.028,-42.948 71.581,-44.501 83.441,-44.501 86.047,-47.107 v1(86.157,-47.107)
TX_N: R16.1 T1.3 U1.56 | length 18.2
  Top Layer w0.254: U1.56@63.785,-36.421 67.44,-36.421 68.408,-37.389 69.012,-37.389 69.266,-37.135 69.266,-36.5 69.774,-35.992 T1.3@71.107,-35.992
  Top Layer w0.5: T1.3@71.107,-35.992 73.203,-35.992 73.838,-35.357 73.838,-32.69 71.806,-30.658 71.806,-29.653 R16.1@71.795,-29.642
TX_P: R13.1 T1.1 U1.57 | length 18.5
  Top Layer w0.254: U1.57@63.785,-36.021 67.078,-36.021 69.647,-33.452 T1.1@71.107,-33.452
  Top Layer w0.5: T1.1@71.107,-33.452 69.774,-33.452 69.52,-33.198 69.52,-27.356 70.155,-26.721 R13.1@71.795,-26.721
U3CTS: U1.106 U41.4 | length 61.4
  Top Layer w0.254: U1.106@48.585,-36.821 51.934,-36.821 52.502,-37.389 57.582,-37.389 v1(58.09,-36.881) ; U41.4@91.343,-15.295 91.874,-15.295 92.32,-14.848 92.32,-14.843 92.822,-14.341 92.888,-14.275 v1(92.888,-14.214)
  Bottom Layer w0.5: v1(58.09,-36.881) 58.344,-36.627 58.344,-32.69 63.932,-27.102 74.6,-27.102 79.045,-22.657 87.808,-22.657 90.668,-19.797 90.668,-14.971 91.364,-14.275 91.43,-14.341 91.557,-14.214 v1(92.888,-14.214)
U3RTS: U1.105 U41.1 | length 58.1
  Top Layer w0.254: U1.105@48.585,-36.421 52.1,-36.421 52.712,-36.881 56.947,-36.881 58.471,-35.357 59.995,-35.357 61.011,-34.341 v1(61.265,-34.341) ; U41.1@91.343,-16.795 93.376,-16.795 v1(93.523,-16.942)
  Bottom Layer w0.5: v1(61.265,-34.341) 61.265,-33.706 65.075,-29.896 75.997,-29.896 80.569,-25.324 88.57,-25.324 93.65,-20.244 93.65,-17.069 v1(93.523,-16.942)
U3RX: U1.37 U41.3 | length 65.4
  Top Layer w0.254: U1.37@63.785,-44.021 65.037,-44.021 ; 65.037,-44.025 65.295,-44.025 66.472,-45.202 v1(66.726,-45.202) ; U41.3@91.343,-15.795 92.384,-15.795 v1(93.142,-15.037)
  Bottom Layer w0.5: v1(66.726,-45.202) 64.694,-45.202 63.282,-43.79 63.282,-40.488 59.233,-36.439 59.233,-33.071 64.186,-28.118 74.981,-28.118 79.553,-23.546 88.062,-23.546 91.872,-19.736 91.872,-16.18 93.015,-15.037 v1(93.142,-15.037)
U3TX: U1.38 U41.2 | length 62.2
  Top Layer w0.254: U1.38@63.785,-43.621 65.653,-43.621 66.472,-44.44 v1(66.599,-44.44) ; U41.2@91.343,-16.295 92.9,-16.295 v1(93.269,-15.926)
  Bottom Layer w0.5: v1(66.599,-44.44) 64.948,-44.44 63.932,-43.424 63.932,-39.802 60.249,-36.119 60.249,-33.452 64.694,-29.007 75.362,-29.007 79.934,-24.435 88.316,-24.435 92.761,-19.99 92.761,-16.434 v1(93.269,-15.926)
USB_5V: C1.2 C4.+ C7.1 J4.1 R8.2 U10.1 U32.7 | length 15
  Top Layer w0.5: J4.1@38.786,-4.689 40.056,-4.689 41.326,-5.959 41.326,-11.166 ; C7.1@40.437,-16.243 40.437,-17.135 40.945,-17.643 U10.1@46.025,-17.643
USB_ID: D3.2 L3.1 U1.95 | length 22.4
  Top Layer w0.254: v1(49.2,-23.104) 49.454,-23.104 49.454,-28.057 50.385,-28.988 U1.95@50.385,-31.821
  Top Layer w0.5: D3.2@45.263,-13.926 45.993,-14.656 v1(47.295,-14.656) 47.422,-14.529 L3.1@47.422,-13.259
  Bottom Layer w0.254: v1(47.295,-14.656) 49.223,-16.584 49.223,-23.081 v1(49.2,-23.104)
USB_N: D4.2 L1.1 U1.93 | length 23.3
  Top Layer w0.254: v1(50.724,-22.723) 50.47,-22.977 50.47,-27.549 51.185,-28.264 U1.93@51.185,-31.821
  Top Layer w0.5: L1.1@51.105,-13.259 50.978,-13.386 v1(50.978,-15.037) 51.835,-15.894 D4.2@54.28,-15.894
  Bottom Layer w0.254: v1(50.724,-22.723) 50.724,-22.542 50.112,-21.93 50.112,-15.903 v1(50.978,-15.037)
USB_P: D3.1 L2.1 U1.94 | length 24
  Top Layer w0.254: v1(49.962,-22.596) 49.962,-27.803 50.785,-28.626 U1.94@50.785,-31.821
  Top Layer w0.5: D3.1@45.263,-15.926 48.438,-15.926 49.327,-15.037 v1(49.327,-14.656) L2.1@49.327,-13.259
  Bottom Layer w0.254: v1(49.327,-14.656) 49.708,-15.037 49.708,-22.342 v1(49.962,-22.596)
USB_VBUS: C5.2 D4.1 J7.1 R2.2 U1.96 U10.6 | length 37
  Top Layer w0.254: v1(48.184,-16.881) 48.575,-17.272 U10.6@48.575,-17.643 ; v1(48.438,-22.85) 48.438,-23.358 48.946,-23.866 48.946,-28.311 49.985,-29.35 U1.96@49.985,-31.821
  Top Layer w0.5: U10.6@48.575,-17.643 R2.2@51.929,-17.643 ; J7.1@50.47,-8.306 50.47,-9.576 52.502,-11.608 v1(52.502,-12.751) 54.214,-12.751 54.28,-12.817 ; R2.2@51.867,-17.581 v1(51.867,-16.754) ; D4.1@54.28,-13.894 54.28,-12.817 ; C5.2@57.19,-11.928 54.849,-11.928 54.28,-12.497 54.28,-12.817
  Bottom Layer w0.254: v1(48.184,-16.881) 48.819,-17.516 48.819,-22.469 v1(48.438,-22.85)
  Bottom Layer w0.5: v1(51.867,-16.754) 51.867,-13.386 v1(52.502,-12.751)
USB_VBUSEN: U1.40 U10.3 | length 45.3
  Top Layer w0.254: U1.40@63.785,-42.821 65.538,-42.821 66.268,-43.551 v1(66.599,-43.551)
  Top Layer w0.5: U10.3@46.025,-19.543 46.782,-19.543 48.184,-20.945 v1(50.978,-20.945) ; v1(61.392,-22.342) 64.059,-25.009 v1(64.059,-32.121)
  Bottom Layer w0.5: v1(50.978,-20.945) 51.74,-20.183 59.233,-20.183 v1(61.392,-22.342) ; v1(64.059,-32.121) 63.043,-33.137 63.043,-37.455 64.694,-39.106 64.694,-43.043 65.202,-43.551 v1(66.599,-43.551)
pads on no net: J1.7 J2.7 J3.A J5.A J6.A J7.X J7.Y JP5. JP6.7 JP7.4 T1.4 T1.5 T1.12 T1.13 U1.9 U1.35 U1.36 U1.49 U1.50 U1.60 U1.65 U1.66 U1.67 U1.71 U1.72 U1.73 U1.74 U1.75 U1.76 U1.77 U1.78 U1.81 U1.82 U1.83 U1.84 U1.85 U1.86 U1.91 U1.92 U1.102 U1.103 U1.104 U1.112 U1.116 U1.120 U1.121 U1.123 Y1.2 Y1.4

## Polygon pours and split planes (outlines as drawn)
3V3 on Top Layer "Keep-Out Layer-No Net" (solid, remove dead copper, pour order 13): 34.581,-29.581 29.515,-29.581 29.515,-37.455 33.833,-37.455 34.722,-38.344 35.23,-38.852 37.262,-38.852 37.897,-38.852 37.897,-32.897
GND on Top Layer "Keep-Out Layer-No Net" (solid, remove dead copper, pour order 23): 100,-80 100,0 0,0 0,-80
USB_5V on Top Layer "Keep-Out Layer-No Net" (solid, remove dead copper, pour order 21): 32.881,-11.42 34.278,-10.023 40.628,-10.023 40.755,-10.023 41.644,-10.912 41.771,-11.039 41.771,-14.976 41.771,-16.754 32.881,-16.754
CAN-12V on Top Layer "Keep-Out Layer-No Net" (solid, remove dead copper, pour order 19): 26.34,-17.643 26.34,-11.801 24.689,-10.15 16.434,-10.15 16.434,-17.643 18.974,-17.643
GND on Bottom Layer "Keep-Out Layer-No Net" (solid, remove dead copper, pour order 25): 100,-80 0,-80 0,0 100,0

## Keep-outs
Keep-Out Layer:
  lines w0.1: -0.013,-5.004 cw(c4.987,-5.004) 4.987,-0.004 ; 0,-75 0,-5 ; 0.004,-75.013 ccw(c5.004,-75.013) 5.004,-80.013 ; 5,-80 95,-80 ; 5,0 95,0 ; 94.996,0.013 cw(c94.996,-4.987) 99.996,-4.987 ; 95.013,-79.996 ccw(c95.013,-74.996) 100.013,-74.996 ; 100,-75 100,-5

## Other copper
Top Layer:
  region net 3V3: 31.623,-29.581 31.623,-35.575 34.163,-35.575 34.163,-29.581
  region net EARTH: 44.882,-4.623 42.977,-4.623 42.977,-8.052 44.882,-8.052
  region net EARTH: 54.661,-4.242 53.01,-4.242 53.01,-8.56 54.661,-8.56
  region net EARTH: 53.518,-3.099 44.247,-3.099 44.247,-5.004 53.518,-5.004
  region net GND: 33.833,-3.546 25.451,-3.546 25.451,-8.753 33.833,-8.753
  region net GND: 31.801,-1.006 27.61,-1.006 27.61,-11.039 31.801,-11.039

## Silkscreen, mask and mechanical layers (free items; w line width, h text height)
Top Overlay:
  circle w0.6: c50.47,-21.58 r0.15
  circle w0.6: c44.628,-17.77 r0.15
  lines w0.254: 11.43,-6.106 12.192,-6.233 12.573,-6.995 12.065,-7.63 12.573,-8.128 13.208,-7.757 13.589,-7.884 13.995,-6.614 cw(c14.504,-5.791) 14.94,-6.655 15.367,-7.884 15.684,-7.696 16.383,-8.138 16.825,-7.625 16.434,-7.01 16.764,-6.233 17.526,-6.106 17.526,-5.471 16.637,-5.217 16.383,-4.455 16.891,-3.82 16.378,-3.307 15.621,-3.82 14.986,-3.571 14.859,-2.804 14.097,-2.809 13.97,-3.586 13.32,-3.851 12.621,-3.404 12.128,-3.896 12.543,-4.577 12.319,-5.217 11.43,-5.471 11.43,-6.106
  lines w0.5: 11.1,-74.285 11.1,-74.031 11.1,-73.523 ; 11.227,-73.65 11.227,-74.158 11.862,-73.523 11.1,-73.523 ; 12.751,-75.174 11.1,-73.523
  text "Designed By Luke Hovington" at 62.433,-8.519 h1
  text "INPUT" at 61.468,-9.906 h4
  text "open hardware" at 8.14,-9.996 h2
  text "For Hackerspace Brisbane V1.0" at 62.433,-10.297 h1
  text "FTDI" at 80.391,-16.637 h1
  text "GND" at 73.914,-16.764 h1
  text "PROGRAM" at 37.77,-21.453 h0.9 r270
  text "I2C" at 27.813,-21.59 h0.9
  text "RESET" at 70.358,-22.606 h1
  text "CAN" at 12.243,-29.769 h1 r270
  text "GND" at 96.647,-45.593 h1
  text "MISC-IO" at 92.075,-53.34 h1
  text "+ / -" at 18.593,-53.457 h2 r90
  text "1" at 93.853,-60.198 h2
  text "11" at 68.707,-60.325 h2
  text "9" at 83.566,-60.325 h2
  text "29" at 32.131,-60.452 h2
  text "19" at 56.642,-60.579 h2
  text "21" at 48.006,-62.103 h2
  text "20" at 56.134,-68.961 h2
  text "30" at 32.893,-69.215 h2
  text "22" at 44.831,-69.215 h2
  text "12" at 68.58,-69.215 h2
  text "10" at 83.058,-69.215 h2
  text "2" at 93.599,-69.342 h2
  text "+ / -" at 18.847,-75.047 h2 r90
  text "12V" at 10.414,-78.359 h2
Top Solder:
  region: 50.47,-6.782 47.295,-6.782 47.295,-9.83 50.47,-9.83